# Altium PCB PCB2.PcbDoc (part 1 of 2)
Units mm, origin at the board's own origin, x right, y up, seen from the top; angles counter-clockwise.
Board outline 152.4 x 101.6 mm, 2 copper layers (Top Layer, Bottom Layer); 137 components, 157 nets, 564 pads, 402 vias.
Unrouted connection lines stored in the file: 6.
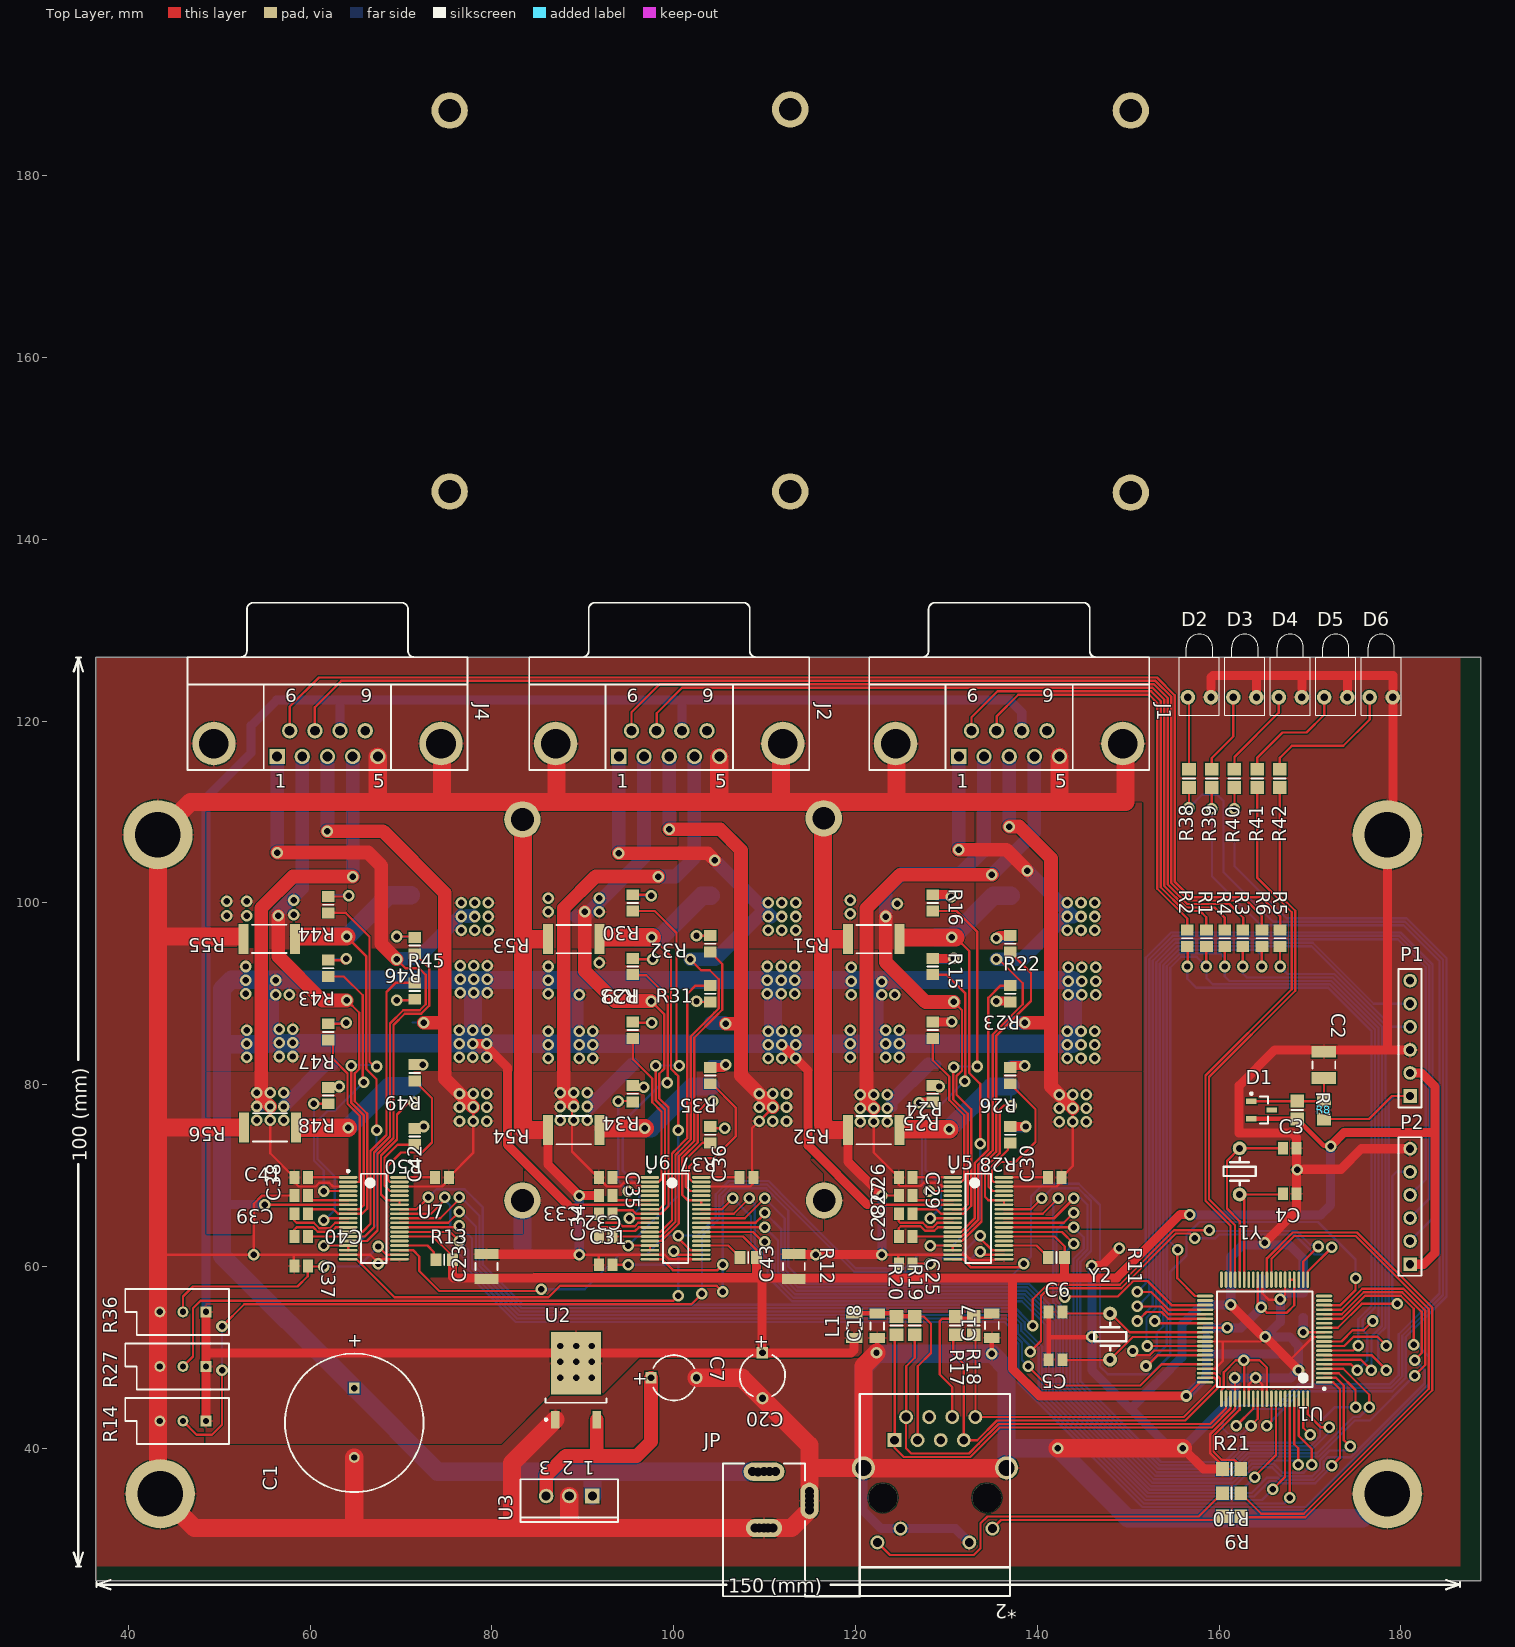
[diagram p0: Top Layer view]
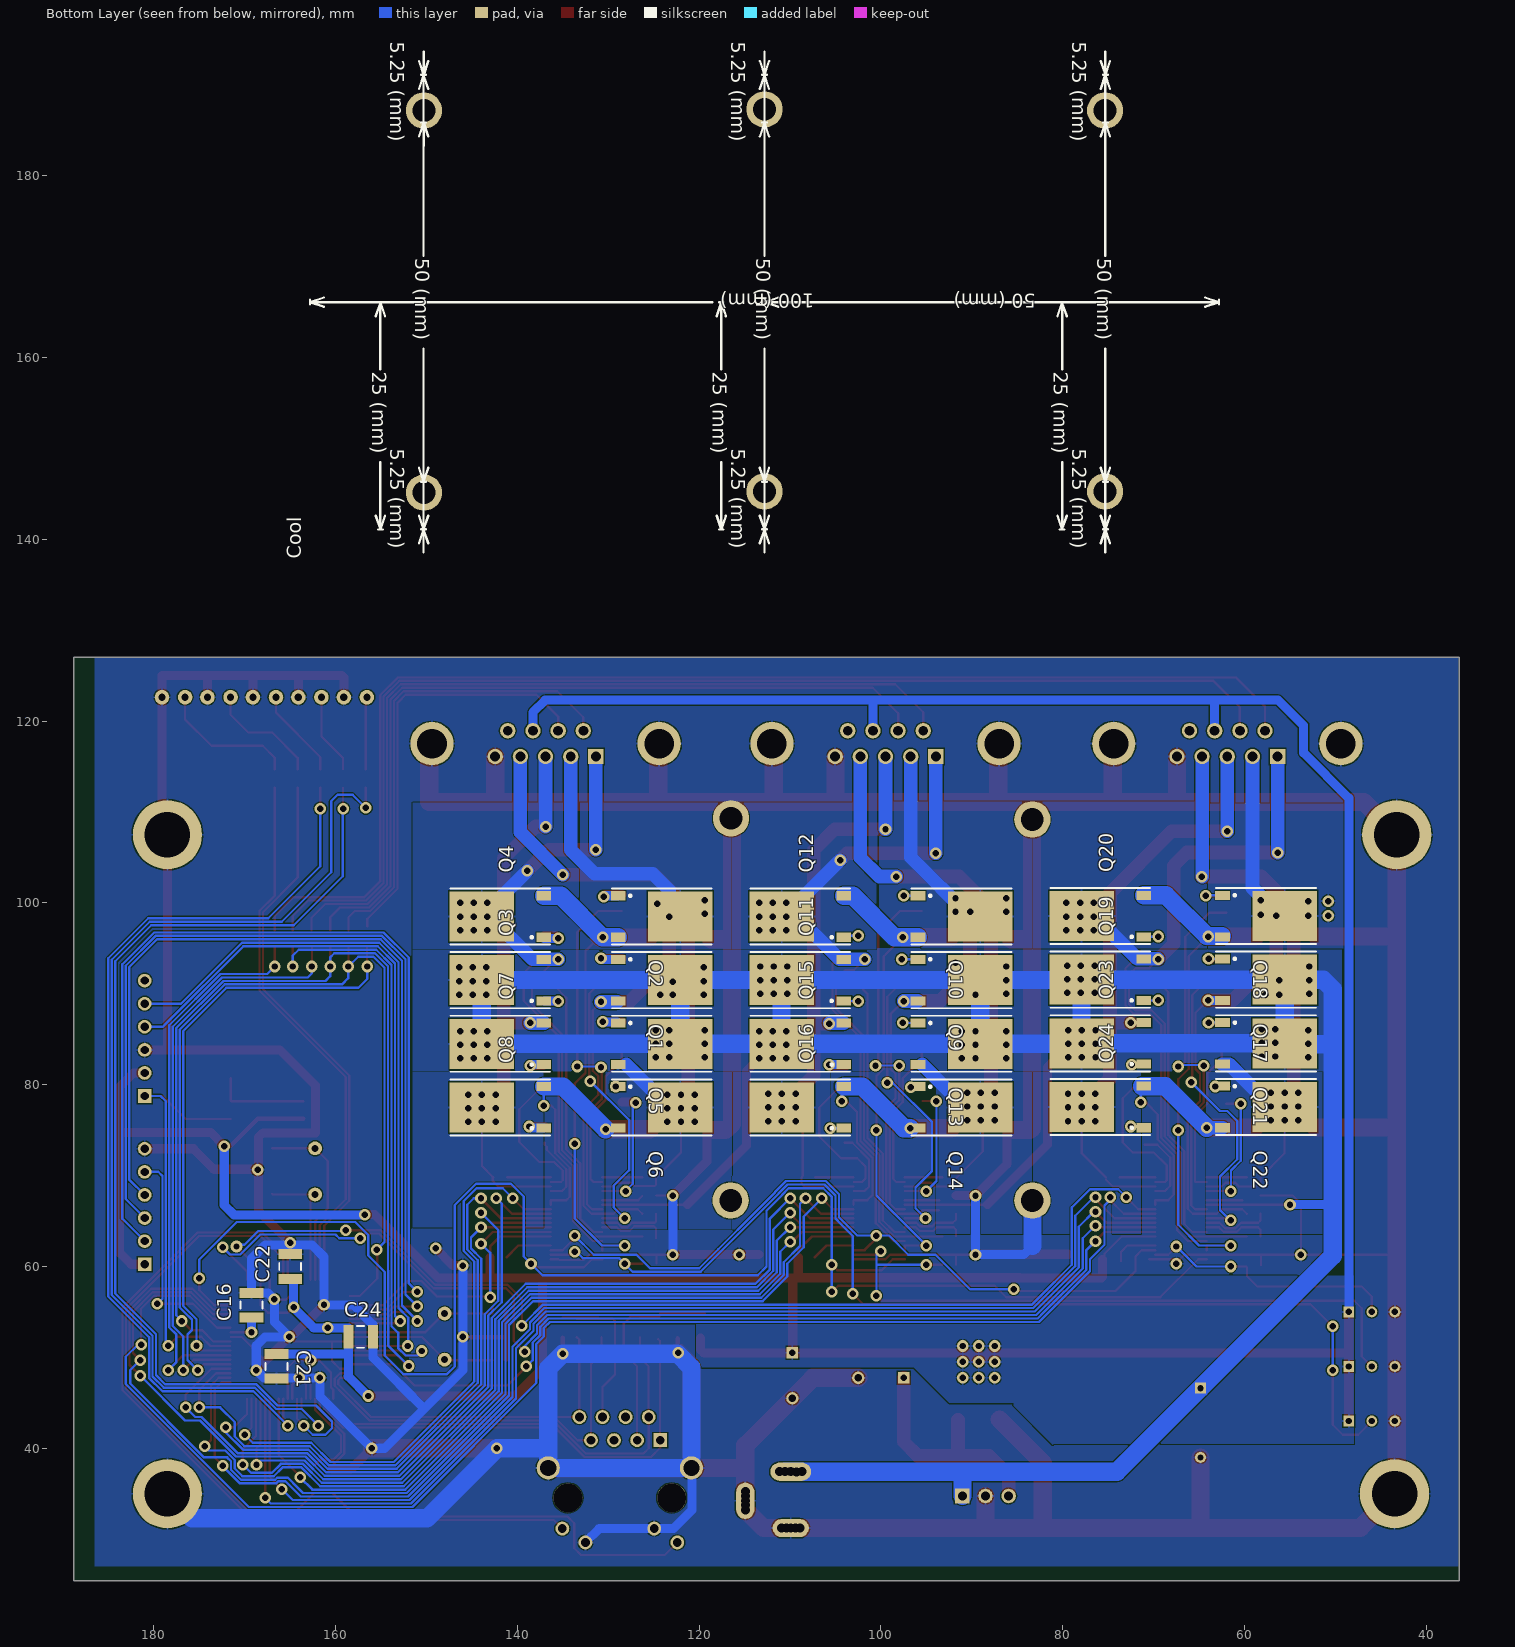
[diagram p1: Bottom Layer view, seen from below]

## Layer stack, top to bottom
Top Layer: signal copper 0.0356
Dielectric: dielectric 0.32, FR-4, Dk 4.8
Bottom Layer: signal copper 0.0356

## Board outline
36.4,25.4 188.8,25.4 188.8,127 36.4,127

## Design rules (kind name [scope] priority, off if disabled: settings)
Clearance [All] p1: gap=0.127
PolygonConnect [All] p1: connectstyle=Relief reliefconductorwidth=0.254 reliefentries=4 polygonreliefangle="90 Angle"
RoutingVias [All] p1: holewidth=0.711 width=1.27 viastyle="Through Hole" minholewidth=0.711 minwidth=1.27 maxholewidth=0.711 maxwidth=1.27
SilkscreenOverComponentPads [All] p1: minsilkscreentomaskgap=0.254
SolderMaskExpansion [All] p1: expansion=0.102
Width [All] p1: maxlimit=2.54 minlimit=0.254 preferedwidth=0.254
27 further rules are at their usual default settings.

## Components (designator, comment, footprint, x,y, rotation, side; value= is the part's Value field where it differs from the comment)
*2 "LU1T516-43" EthernetCON 128.729,34.544 r270 top
C1 "Cap Pol1" RB7.6-15 64.848,42.799 r90 top
C2 "Cap" CAPC3225N 171.528,82.169 r270 top
C3 "Cap" CAPC2012L 167.75,73 r0 top
C4 "Cap" CAPC2012L 167.75,68 r180 top
C5 "Cap" CAPC2012L 142,49.75 r180 top
C6 "Cap" CAPC2012L 142,55 r0 top
C7 "Cap Pol1" CAPPR5-5x5 100,47.75 r0 top
C16 "Cap" CAPC3225L 169.25,55.75 r90 bottom
C17 "Cap" CAPC3216L 135,53.5 r90 top
C18 "Cap" CAPC3216L 122.379,53.467 r90 top
C20 "Cap Pol1" CAPPR5-5x5 109.75,48 r270 top
C21 "Cap" CAPC3225L 166.5,49 r270 bottom
C22 "Cap" CAPC3225L 165,60 r90 bottom
C23 "Cap" CAPC3225L 79.4,60 r90 top
C24 "Cap" CAPC3225L 157.25,52.25 r180 bottom
C25 "Cap" CAPC2012L 125.5,60.3 r0 top
C26 "Cap" CAPC2012L 125.5,67.8 r180 top
C27 "Cap" CAPC2012L 125.5,65.8 r180 top
C28 "Cap" CAPC2012L 125.5,63.3 r180 top
C29 "Cap" CAPC2012L 125.5,69.8 r0 top
C30 "Cap" CAPC2012L 141.9,69.8 r180 top
C31 "Cap" CAPC2012L 92.5,60.2 r0 top
C32 "Cap" CAPC2012L 92.5,67.8 r180 top
C33 "Cap" CAPC2012L 92.5,65.8 r180 top
C34 "Cap" CAPC2012L 92.5,63.3 r180 top
C35 "Cap" CAPC2012L 92.5,69.8 r0 top
C36 "Cap" CAPC2012L 108,69.8 r180 top
C37 "Cap" CAPC2012L 59,60.05 r0 top
C38 "Cap" CAPC2012L 59,67.8 r180 top
C39 "Cap" CAPC2012L 59,65.8 r180 top
C40 "Cap" CAPC2012L 59,63.3 r180 top
C41 "Cap" CAPC2012L 59,69.8 r0 top
C42 "Cap" CAPC2012L 74.5,69.8 r180 top
C43 "Cap" CAPC3225L 113.2,60 r90 top
Cool "Cooler" "PCBComponent_1 - duplicate" 62.9,141.2 r0 bottom
D1 "Diode" SOT95P240-3N 164.67,77.216 r0 top
D2 "Power" LED-1 157.825,122.625 r90 top
D3 "Run" LED-1 162.825,122.625 r90 top
D4 "Alfa" LED-1 167.825,122.625 r90 top
D5 "Delta" LED-1 172.825,122.625 r90 top
D6 "Focus" LED-1 177.825,122.625 r90 top
J1 "D Connector 9" D-SUB-9 136.9,116.1 r0 top
J2 "D Connector 9" D-SUB-9 99.5,116.1 r0 top
J4 "D Connector 9" D-SUB-9 61.9,116.1 r0 top
JP "PWR2.5" KLD-0202 109.925,23.725 r90 top
L1 "Inductor" INDC3216AL 119.839,53.467 r90 top
P1 "Программатор" HDR1X6 181,78.75 r90 top
P2 "SPI" HDR1X6 181,60.25 r90 top
Q1 "IRFR2405" TO-252AA 125.5,91.5 r270 bottom
Q2 "IRFR2405" TO-252AA 125.5,98.5 r270 bottom
Q3 "IRFR2405" TO-252AA 140.5,91.5 r90 bottom
Q4 "IRFR2405" TO-252AA 140.5,98.5 r90 bottom
Q5 "IRFR2405" TO-252AA 125.5,84.5 r270 bottom
Q6 "IRFR2405" TO-252AA 125.5,77.5 r270 bottom
Q7 "IRFR2405" TO-252AA 140.5,84.5 r90 bottom
Q8 "IRFR2405" TO-252AA 140.5,77.5 r90 bottom
Q9 "IRFR2405" TO-252AA 92.5,91.5 r270 bottom
Q10 "IRFR2405" TO-252AA 92.5,98.5 r270 bottom
Q11 "IRFR2405" TO-252AA 107.5,91.5 r90 bottom
Q12 "IRFR2405" TO-252AA 107.5,98.5 r90 bottom
Q13 "IRFR2405" TO-252AA 92.5,84.5 r270 bottom
Q14 "IRFR2405" TO-252AA 92.5,77.5 r270 bottom
Q15 "IRFR2405" TO-252AA 107.5,84.5 r90 bottom
Q16 "IRFR2405" TO-252AA 107.5,77.5 r90 bottom
Q17 "IRFR2405" TO-252AA 59,91.55 r270 bottom
Q18 "IRFR2405" TO-252AA 59,98.55 r270 bottom
Q19 "IRFR2405" TO-252AA 74.5,91.55 r90 bottom
Q20 "IRFR2405" TO-252AA 74.5,98.55 r90 bottom
Q21 "IRFR2405" TO-252AA 59,84.55 r270 bottom
Q22 "IRFR2405" TO-252AA 59,77.55 r270 bottom
Q23 "IRFR2405" TO-252AA 74.5,84.55 r90 bottom
Q24 "IRFR2405" TO-252AA 74.5,77.55 r90 bottom
R1 "Res2" RESC2012N 158.6,96.1 r270 top
R2 "Res2" RESC2012N 156.5,96.1 r270 top
R3 "Res2" RESC2012N 162.6,96.1 r270 top
R4 "Res2" RESC2012N 160.6,96.1 r270 top
R5 "Res2" RESC2012N 166.7,96.1 r270 top
R6 "Res2" RESC2012N 164.7,96.1 r270 top
R7 "Res2" RESC2012M 168.607,77.216 r270 top
R8 "Res2" RESC2012M 171.528,77.216 r90 top
R9 "Res2" RESC2012M 161.368,32.512 r180 top
R10 "Res2" RESC2012M 161.368,35.052 r180 top
R11 "Res2" RESC2012N 142.1,61 r0 top
R12 "Res2" RESC2012N 108.2,61 r0 top
R13 "Res2" RESC2012N 74.75,60.75 r0 top
R14 "RPot" VR5 46,43 r180 top
R15 "Res2" RESC2012N 128.5,93 r270 top
R16 "Res2" RESC2012N 128.5,100 r270 top
R17 "Res2" RESC2012M 131,53.5 r270 top
R18 "Res2" RESC2012M 133,53.5 r270 top
R19 "Res2" RESC2012M 126.5,53.5 r270 top
R20 "Res2" RESC2012M 124.5,53.5 r270 top
R21 "Res2" RESC2012M 161.368,37.719 r0 top
R22 "Res2" RESC2012N 137,90 r90 top
R23 "Res2" RESC2012N 137,95.5 r270 top
R24 "Res2" RESC2012N 128.5,86 r270 top
R25 "Res2" RESC2012N 128.5,79 r270 top
R26 "Res2" RESC2012N 137,81 r270 top
R27 "RPot" VR5 46,49 r180 top
R28 "Res2" RESC2012N 137,74.5 r270 top
R29 "Res2" RESC2012N 95.5,93 r270 top
R30 "Res2" RESC2012N 95.5,100 r270 top
R31 "Res2" RESC2012N 104,90 r90 top
R32 "Res2" RESC2012N 104,95.5 r270 top
R33 "Res2" RESC2012N 95.5,86 r270 top
R34 "Res2" RESC2012N 95.5,79 r270 top
R35 "Res2" RESC2012N 104,81 r270 top
R36 "RPot" VR5 46,55 r180 top
R37 "Res2" RESC2012N 104,74.5 r270 top
R38 "Res2" RESC2012M 156.675,113.7 r90 top
R39 "Res2" RESC2012M 159.175,113.7 r90 top
R40 "Res2" RESC2012M 161.675,113.7 r90 top
R41 "Res2" RESC2012M 164.175,113.7 r90 top
R42 "Res2" RESC2012M 166.675,113.7 r90 top
R43 "Res2" RESC2012N 62,92.8 r270 top
R44 "Res2" RESC2012N 62,99.8 r270 top
R45 "Res2" RESC2012N 71.5,90.3 r90 top
R46 "Res2" RESC2012N 71.5,95.3 r270 top
R47 "Res2" RESC2012N 62,85.8 r270 top
R48 "Res2" RESC2012N 62,78.8 r270 top
R49 "Res2" RESC2012N 71.5,81.3 r270 top
R50 "Res2" RESC2012N 71.5,74.3 r270 top
R51 "Res2" RESC6332L 122,96 r180 top
R52 "Res2" RESC6332L 122,75 r180 top
R53 "Res2" RESC6332L 89,96 r180 top
R54 "Res2" RESC6332L 89,75 r180 top
R55 "Res2" RESC6332L 55.5,96.05 r180 top
R56 "Res2" RESC6332L 55.575,75.3 r180 top
U1 "PIC18F87J60-I/PT" TQFP-PT80_N 165,52 r180 top
U2 "LM1117DT-3.3" TD03B_N 89.25,47.5 r90 top
U3 "µA78M05CKC" KC03 88.5,34.75 r180 top
U5 "A3986" TSSOP50P640-38AM 133.5,65.3 r0 top
U6 "A3986" TSSOP50P640-38AM 100.2,65.3 r0 top
U7 "A3986" TSSOP50P640-38AM 67,65.3 r0 top
Y1 "XTAL" Quartz 162.25,73 r270 top
Y2 "XTAL" Quartz 148,49.75 r90 top

## Footprints (in the part's own frame and the unit in brackets; to place one, negate y for a bottom-side part, rotate by r counter-clockwise, add the part's x,y. Pads: shape width x height; smd on the part's side, far side on the other; paste and mask are expansions set on the pad)
CAPC2012L [mm] "Chip Capacitor, Body 2.0x1.3mm, IPC High Density"
  rect 1.1x1.4 smd: 1(-0.75,0) 2(0.75,0)
  body extent -1.1,-0.72 1.1,0.72, height 1.4
CAPC3216L [mm] "Chip Capacitor, Body 3.2x1.6mm, IPC High Density"
  rect 1.1x1.7 smd: 1(-1.35,0) 2(1.35,0)
  silkscreen extent -0.4,-0.75 0.4,0.75, body extent -1.7,-0.9 1.7,0.9, height 1.3
CAPC3225L [mm] "Chip Capacitor, Body 3.2x2.5mm, IPC High Density"
  rect 1.1x2.6 smd: 1(-1.35,0) 2(1.35,0)
  silkscreen extent -0.4,-1.2 0.4,1.2, body extent -1.7,-1.35 1.7,1.35, height 1.5
CAPC3225N [mm] "Chip Capacitor, Body 3.2x2.5mm, IPC Medium Density"
  rect 1.3x2.7 smd: 1(-1.45,0) 2(1.45,0)
  silkscreen extent -0.4,-1.25 0.4,1.25, body extent -1.7,-1.35 1.7,1.35, height 1.5
CAPPR5-5x5 [mm] "Capacitor, Electrolytic, Radial; Body 5 x 5 mm (Dia.xH typ); Pin Spacing 5 mm (typ)"
  rect 1.25x1.25 hole 0.75: 1(-2.5,0)
  round 1.35 hole 0.8: 2(2.5,0)
  silkscreen extent -2.26,-2.5 2.27,2.5
D-SUB-9 [mm] "Connector"
  rect 1.69x1.69 hole 1.09: 1(-5.54,0)
  round 1.69 hole 1.09: 2(-2.77,0) 3(0,0) 4(2.77,0) 5(5.54,0) 6(-4.155,2.84) 7(-1.385,2.84) 8(1.385,2.84) 9(4.155,2.84)
  round 4.76 hole 3.26: 10(-12.495,1.42) 11(12.495,1.42)
  silkscreen extent -15.4,-1.48 15.4,16.92, body extent -15.49,-1.52 15.49,17.02, height 6.35
EthernetCON [mil] "Ethernet connector w/two LEDs"
  rect 60x60 hole 38: 1(-250,-175)
  round 60 hole 38: 2(-350,-125) 3(-250,-75) 4(-350,-25) 5(-250,25) 6(-350,75) 7(-250,125) 8(-350,175) 9(193,-249) 10(133,-149) 11(193,149) 12(133,249)
  round 100 hole 70: 13(-130,-310) 14(-130,310)
  round 125 hole 125 unplated: 15(0,-225) 16(0,225)
  silkscreen extent -450,-325 425,325, body extent -450,-325 425,325, height 550
HDR1X6 [mm] "Connector; Header; 6 Position"
  rect 1.5x1.5 hole 0.9: 1(0,0)
  round 1.5 hole 0.9: 2(2.54,0) 3(5.08,0) 4(7.62,0) 5(10.16,0) 6(12.7,0)
  silkscreen extent -1.27,-1.27 13.97,1.27
INDC3216AL [mm] "Chip Inductor, Body 3.2x1.6mm, IPC High Density"
  rect 1.1x1.8 smd: 1(-1.35,0) 2(1.35,0)
  silkscreen extent -0.4,-0.8 0.4,0.8, body extent -1.7,-0.9 1.7,0.9, height 0.55
KC03 [mm] "TO, Thru-Hole, Vertical, Heatsink Mounted; 3 In-Line Leads; Pitch 2.54 mm"
  rect 1.6x1.6 hole 1: 1(-2.54,0)
  round 1.6 hole 1: 2(0,0) 3(2.54,0)
  silkscreen extent -5.35,-1.85 5.35,2.85
KLD-0202 [mm] "DC Power Jack, 2.5mm, KLD Series, PCB Mount"
  oval 2x4.5 hole 1: 1(13.7,0)
  round 1.5 hole 1: 1A(13.7,-1.25) 1B(13.7,1.25) 2A(7.5,-1) 2B(7.5,1) 3A(9.5,-5) 3B(11.5,-5)
  oval 2x4 hole 1: 2(7.5,0)
  oval 4x2 hole 1: 3(10.5,-5)
  silkscreen extent 0,-4.5 14.6,4.5
LED-1 [mm] "Typical RED GaAs LED; 2 Leads"
  round 1.6 hole 0.8: 1(0,1.27) 2(0,-1.27)
  silkscreen extent -2,-2.2 6.95,2.2
"PCBComponent_1 - duplicate" [mm]
  round 4 hole 2.5: 1(12.446,-45.974) 2(49.911,-46.101) 3(87.376,-45.974) 4(87.376,-3.937) 5(49.911,-4.064) 6(12.446,-4.064)
  silkscreen extent -0.09,-52.43 99.91,2.65, body extent 0,-50.04 100.08,0, height 18
Quartz [mil]
  round 60 hole 30: 1(0,0) 2(200,0)
  silkscreen extent 40,-70 160,70, body extent -100,-100 300,100, height 90
RB7.6-15 [mm] "Polarized Capacitor (Radial); 2 Leads"
  rect 1.2x1.2 hole 0.7: 1(3.81,0)
  round 1.2 hole 0.7: 2(-3.81,0)
  silkscreen extent -7.62,-7.62 7.62,7.62
RESC2012M [mm] "Chip Resistor, Body 2.0x1.2mm, IPC Low Density"
  rect 1.4x1.5 smd: 1(-1,0) 2(1,0)
  silkscreen extent 0,-0.65 0,0.65, body extent -1.07,-0.7 1.07,0.7, height 0.7
RESC2012N [mm] "Chip Resistor, Body 2.0x1.2mm, IPC Medium Density"
  rect 1.2x1.4 smd: 1(-0.9,0) 2(0.9,0)
  silkscreen extent 0,-0.6 0,0.6, body extent -1.07,-0.7 1.07,0.7, height 0.7
RESC6332L [mm] "Chip Resistor, Body 6.3x3.2mm, IPC High Density"
  rect 1.1x3.3 smd: 1(-2.85,0) 2(2.85,0)
  silkscreen extent -1.9,-1.55 1.9,1.55, body extent -3.22,-1.68 3.22,1.68, height 0.9
SOT95P240-3N [mm] "SOT23, 3-Leads, Body 2.9x1.3mm, Pitch 0.95mm, Lead Span 2.4mm, IPC Medium Density"
  rect 1.15x0.6 smd: 1(-1.125,0.95) 2(-1.125,-0.95) 3(1.125,0)
  silkscreen extent -1.25,-1.5 0.7,1.92, body extent -0.7,-1.5 0.7,1.5, height 1.14
TD03B_N [mm] "D-PAK, 4-Leads, Body 6.1x6.6mm, Pitch 2.29mm, Lead Span 9.7mm, IPC Medium Density"
  rect 1.9x0.95 smd: 1(-4.35,2.28) 3(-4.35,-2.28)
  rect 6.9x5.5 smd: 4(1.85,0)
  silkscreen extent -4.47,-3.35 -2,3.43, body extent -2.5,-3.35 3.7,3.35, height 2.38
TO-252AA [mm] "D-PAK/TO-252-AA; 3 Leads (1 Cropped); Body 10.4 (inc. leads) x 6.7 mm (LxW max)"
  rect 1x1.6 smd: 1(-2.285,-3.425) 3(2.285,-3.425)
  rect 5.5x7.1 smd: 4(0,3.425)
  silkscreen extent -3.09,-4.13 3.09,6.88
TQFP-PT80_N [mm] "Thin QFP, 80-Leads, Body 12x12mm, Pitch 0.5mm, IPC Medium Density"
  oval 1.8x0.3 smd: 1(-6.55,4.75) 2(-6.55,4.25) 3(-6.55,3.75) 4(-6.55,3.25) 5(-6.55,2.75) 6(-6.55,2.25) 7(-6.55,1.75) 8(-6.55,1.25) 9(-6.55,0.75) 10(-6.55,0.25) 11(-6.55,-0.25) 12(-6.55,-0.75) 13(-6.55,-1.25) 14(-6.55,-1.75) 15(-6.55,-2.25) 16(-6.55,-2.75) 17(-6.55,-3.25) 18(-6.55,-3.75) 19(-6.55,-4.25) 20(-6.55,-4.75) 41(6.55,-4.75) 42(6.55,-4.25) 43(6.55,-3.75) 44(6.55,-3.25) 45(6.55,-2.75) 46(6.55,-2.25) 47(6.55,-1.75) 48(6.55,-1.25) 49(6.55,-0.75) 50(6.55,-0.25) 51(6.55,0.25) 52(6.55,0.75) 53(6.55,1.25) 54(6.55,1.75) 55(6.55,2.25) 56(6.55,2.75) 57(6.55,3.25) 58(6.55,3.75) 59(6.55,4.25) 60(6.55,4.75)
  oval 0.3x1.8 smd: 21(-4.75,-6.55) 22(-4.25,-6.55) 23(-3.75,-6.55) 24(-3.25,-6.55) 25(-2.75,-6.55) 26(-2.25,-6.55) 27(-1.75,-6.55) 28(-1.25,-6.55) 29(-0.75,-6.55) 30(-0.25,-6.55) 31(0.25,-6.55) 32(0.75,-6.55) 33(1.25,-6.55) 34(1.75,-6.55) 35(2.25,-6.55) 36(2.75,-6.55) 37(3.25,-6.55) 38(3.75,-6.55) 39(4.25,-6.55) 40(4.75,-6.55) 61(4.75,6.55) 62(4.25,6.55) 63(3.75,6.55) 64(3.25,6.55) 65(2.75,6.55) 66(2.25,6.55) 67(1.75,6.55) 68(1.25,6.55) 69(0.75,6.55) 70(0.25,6.55) 71(-0.25,6.55) 72(-0.75,6.55) 73(-1.25,6.55) 74(-1.75,6.55) 75(-2.25,6.55) 76(-2.75,6.55) 77(-3.25,6.55) 78(-3.75,6.55) 79(-4.25,6.55) 80(-4.75,6.55)
  silkscreen extent -6.68,-5.25 5.25,5.57, body extent -6,-6 6,6, height 1.2
TSSOP50P640-38AM [mm] "TSSOP, 38-Leads, Body 9.7x4.4mm, Pitch 0.5mm, IPC Low Density"
  oval 2.05x0.3 smd: 1(-2.825,4.5) 2(-2.825,4) 3(-2.825,3.5) 4(-2.825,3) 5(-2.825,2.5) 6(-2.825,2) 7(-2.825,1.5) 8(-2.825,1) 9(-2.825,0.5) 10(-2.825,0) 11(-2.825,-0.5) 12(-2.825,-1) 13(-2.825,-1.5) 14(-2.825,-2) 15(-2.825,-2.5) 16(-2.825,-3) 17(-2.825,-3.5) 18(-2.825,-4) 19(-2.825,-4.5) 20(2.825,-4.5) 21(2.825,-4) 22(2.825,-3.5) 23(2.825,-3) 24(2.825,-2.5) 25(2.825,-2) 26(2.825,-1.5) 27(2.825,-1) 28(2.825,-0.5) 29(2.825,0) 30(2.825,0.5) 31(2.825,1) 32(2.825,1.5) 33(2.825,2) 34(2.825,2.5) 35(2.825,3) 36(2.825,3.5) 37(2.825,4) 38(2.825,4.5)
  silkscreen extent -2.95,-4.9 1.4,5.32, body extent -2.25,-4.9 2.25,4.9, height 1.2
VR5 [mm] "Variable Resistor, Thru-Hole; 3 Leads"
  rect 1.2x1.2 hole 0.7: 1(-2.54,0)
  round 1.2 hole 0.7: 2(0,0) 3(2.54,0)
  silkscreen extent -5.08,-2.54 6.35,2.54

## Part data
C1 C7 C20: "Polarized Capacitor (Radial)"
C2 C3 C4 C5 C6 C16 C17 C18 C21 C22 C23 C24 C25 C26 C27 C28 C29 C30 C31 C32 C33 C34 C35 C36 C37 C38 C39 C40 C41 C42 C43: "Capacitor"
D1: "Default Diode"
D2 D3 D4 D5 D6: library part LED1, "Typical RED GaAs LED"
J1 J2 J4: "Receptacle Assembly, 9 Position, Right Angle"
JP: "Low Voltage Power Supply Connector"
P1 P2: library part "Header 6", "Header, 6-Pin"
Q1 Q2 Q3 Q4 Q5 Q6 Q7 Q8 Q9 Q10 Q11 Q12 Q13 Q14 Q15 Q16 Q17 Q18 Q19 Q20 Q21 Q22 Q23 Q24: "HEXFET Power MOSFET"
R1 R2 R3 R4 R5 R6 R7 R8 R9 R10 R11 R12 R13 R15 R16 R17 R18 R19 R20 R21 R22 R23 R24 R25 R26 R28 R29 R30 R31 R32 R33 R34 R35 R37 R38 R39 R40 R41 R42 R43 R44 R45 R46 R47 R48 R49 R50 R51 R52 R53 R54 R55 R56: "Resistor"
R14 R27 R36: "Potentiometer"
U1: "High Performance, 1-Mbit Flash Microcontroller with Ethernet, 128K Flash, 80-Pin TQFP, Industrial Temperature Range"
U2: "800mA Low-Dropout Linear Regulator"
U3: "Positive-Voltage Regulator"
U5 U6 U7: "Stepper Controller w External Full brige"
Y1 Y2: "Crystal Oscillator"

## Free pads (board coordinates)
  round 4 hole 2.5: 0(83.346,67.264) 1(83.346,109.174) 3(116.5,109.301) 5(116.537,67.264)
  round 1.524 hole 1: 0(109.4,31.225) 0(110.375,31.225) 0(114.925,33.75) 0(114.925,34.75) 1(109.275,37.4) 1(110.55,37.425)
  round 7.62 hole 5: 1(43.25,107.5) 1(43.5,35) 1(178.5,35) 1(178.5,107.5)

## Via types
v1: diameter 1.27, hole 0.711, Top Layer to Bottom Layer, 402 vias

## Nets (pads, with @x,y where several pads share a name; then routed paths per layer and width w, separated by ;. In a path a pad name is that pad's centre, name@x,y a point inside that pad or via, vN(x,y) a via of type N, cw(c..) or ccw(c..) an arc to the next point about the centre after c; other vN are vias at no path point)
+5: C7.1 U2.3 U3.3 | length 26.4
  Top Layer w1.5: U3.3@85.96,34.75 85.96,37.01 88.1,39.15 95.925,39.15 97.5,40.725 C7.1@97.5,47.75 ; 91.53,39.15 U2.3@91.53,43.15
+30: C1.1 JP.1 JP.1A JP.1B pad.1@109.275,37.4 pad.1@110.55,37.425 Q1.4 Q3.4 Q5.4 Q7.4 Q9.4 Q11.4 Q13.4 Q15.4 Q17.4 Q19.4 Q21.4 Q23.4 U3.1 U5.7 U6.7 U7.7 | length 408.2
  Top Layer w0.254: v1@54.686,67.114 v1(55,66.8) U7.7@64.175,66.8 ; 88.3,66.8 U6.7@97.375,66.8 ; 121.3,66.8 U5.7@130.675,66.8
  Top Layer w1: v1(77.9,84.5) 79.1,84.5 81.7,81.9 81.7,73.4 88.3,66.8 ; v1(111.9,84.4) 114.773,81.527 114.773,73.327 121.3,66.8
  Bottom Layer w1: 50.3,66.8 v1(55,66.8)
  Bottom Layer w2: Q21.4@55.046,84.454 50.3,84.454 ; v1(77.9,84.5) Q15.4@110.925,84.5 ; Q19.4@77.9,91.5 Q11.4@110.925,91.5 ; Q13.4@89.075,84.5 Q9.4@89.075,91.5 ; U3.1@91.04,34.75 91.04,37.335 ; pad.1@110.55,37.425 JP.1@109.925,37.425 JP.1B@108.675,37.425 74.032,37.425 C1.1@64.848,46.609 50.3,61.157 50.3,66.8 50.3,73.8 50.3,84.454 ; Q5.4@122.075,84.5 Q1.4@122.075,91.5 ; 50.3,84.454 50.3,90.5 51.35,91.55 Q17.4@55.575,91.55 ; Q17.4@55.575,91.55 Q21.4@55.575,84.55 Q23.4@77.925,84.55 Q19.4@77.925,91.55 Q17.4@55.575,91.55 ; Q15.4@110.925,84.5 Q11.4@110.925,91.5 ; Q15.4@110.925,84.5 Q7.4@143.925,84.5 Q3.4@143.925,91.5 Q11.4@110.925,91.5
  other v1: 86.2,82.9 89.6,82.9 91.1,82.9 110.4,82.9 111.9,82.9 113.4,82.9 143.3,82.9 144.8,82.9 146.3,82.9 53,83 76.4,83 77.9,83 79.4,83 119.4,83 123.3,83 124.8,83 56.6,83.1 58.1,83.1 86.2,84.4 89.6,84.4 91.1,84.4 110.4,84.4 113.4,84.4 143.3,84.4 144.8,84.4 146.3,84.4 53,84.5 76.4,84.5 77.9,84.5 79.4,84.5 119.4,84.5 123.3,84.5 124.8,84.5 56.6,84.6 58.1,84.6 86.2,85.9 89.6,85.9 91.1,85.9 110.4,85.9 111.9,85.9 113.4,85.9 143.3,85.9 144.8,85.9 146.3,85.9 53,86 76.4,86 77.9,86 79.4,86 119.4,86 123.3,86 124.8,86 56.6,86.1 58.1,86.1 56.2,89.9 57.7,89.9 89.6,89.9 119.5,89.9 122.9,89.9 124.3,89.9 143.4,89.9 144.9,89.9 146.4,89.9 52.9,90 86.2,90 110.3,90 111.8,90 113.3,90 76.5,90.1 78,90.1 79.5,90.1 122.9,91.3 119.5,91.4 143.4,91.4 144.9,91.4 146.4,91.4 52.9,91.5 56.2,91.5 86.2,91.5 110.3,91.5 111.8,91.5 113.3,91.5 76.5,91.6 78,91.6 79.5,91.6 119.5,92.9 143.4,92.9 144.9,92.9 146.4,92.9 52.9,93 86.2,93 110.3,93 111.8,93 113.3,93 76.5,93.1 78,93.1 79.5,93.1 91.8,93.4
DIRALFA: U1.17 U5.30 | length 95.9
  Top Layer w0.254: U5.30@136.325,65.8 140.6,65.8 v1(142.3,67.5) ; U1.17@171.55,55.25 173.434,55.25 175.735,57.551 180.284,57.551 182.67,55.165 182.67,49.17 v1(181.5,48)
  Bottom Layer w0.254: v1(142.3,67.5) 141.73,66.93 141.73,56.074 143.206,54.598 143.206,46.739 152.969,36.976 161.202,36.976 163.315,39.089 170.943,39.089 174.916,43.062 176.562,43.062 v1(181.5,48)
DIRDELTA: U1.16 U6.30 | length 128.8
  Top Layer w0.254: U6.30@103.025,65.8 106.6,65.8 v1(108.3,67.5) ; U1.16@171.55,54.75 173.472,54.75 175.892,57.17 180.126,57.17 182.289,55.007 182.289,50.489 v1(181.5,49.7)
  Bottom Layer w0.254: v1(108.3,67.5) 108.9,66.9 108.9,62.251 110.683,60.468 110.683,59.062 113.178,56.567 138.439,56.567 141.301,53.705 141.301,45.95 152.18,35.071 163.571,35.071 164.129,35.629 165.27,36.77 166.426,36.77 166.647,36.549 170.41,36.549 171.511,37.65 171.511,38.579 171.932,39 174.461,39 182.6,47.139 182.6,48.6 v1(181.5,49.7)
DIRFOCUS: U1.15 U7.30 | length 161.1
  Top Layer w0.254: U7.30@69.825,65.8 73.3,65.8 74.8,67.3 v1(74.8,67.6) ; U1.15@171.55,54.25 173.511,54.25 176.05,56.789 179.968,56.789 181.4,55.357 v1(181.4,51.4)
  Bottom Layer w0.254: v1(74.8,67.6) 74.8,67.3 75.4,66.7 75.4,62.4 77,60.8 77,59.506 82.606,53.9 85.7,53.9 136.406,53.9 137.087,53.219 137.087,52.297 137.919,51.465 137.919,47.176 151.548,33.547 169.547,33.547 183.075,47.075 183.075,50.075 181.75,51.4 v1(181.4,51.4)
GND: *2.10 *2.11 *2.13 *2.14 C1.2 C2.1 C3.2 C4.1 C5.2 C6.1 C7.2 C16.2 C17.1 C18.1 C20.2 C21.2 C22.2 C23.2 C24.2 C25.1 C26.2 C31.1 C32.2 C37.1 C38.2 C43.2 Cool.1 Cool.2 Cool.3 Cool.4 Cool.5 Cool.6 D2.2 D3.2 D4.2 D5.2 D6.2 J1.5 J1.10 J1.11 J2.5 J2.10 J2.11 J4.5 J4.10 J4.11 JP.2 JP.2A JP.2B JP.3 JP.3A JP.3B P1.3 P2.6 pad.0 pad.1@43.5,35 pad.1@43.25,107.5 pad.1@83.346,109.174 pad.1@178.5,35 pad.1@178.5,107.5 pad.3 pad.5 R14.3 R21.1 R27.3 R36.3 R51.2 R52.2 R53.2 R54.2 R55.2 R56.2 U1.11 U1.26 U1.31 U1.51 U1.57 U1.64 U1.67 U1.70 U2.1 U3.2 U5.18 U5.20 U6.18 U6.20 U7.18 U7.20 | length 1078.2
  Top Layer w0.254: 43.35,61.3 58.2,61.3 ; v1(53.8,61.3) 53.8,66.9 54.7,67.8 C38.2@58.25,67.8 ; C37.1@58.2,60.1 58.2,61.3 ; U7.20@70.5,60.8 U7.20@69.825,60.8 67.1,60.8 66.6,61.3 U7.18@64.175,61.3 58.2,61.3 ; v1(89.6,61.3) U6.18@97.375,61.3 99,61.3 99.5,60.8 U6.20@103.025,60.8 ; C31.1@91.75,60.2 91.75,61.25 ; JP.2B@108.925,31.225 pad.0@109.4,31.225 ; v1@122.646,68.054 v1@122.9,68.054 ; v1(122.9,61.3) 124.7,61.3 ; v1(122.9,67.8) C26.2@124.75,67.8 ; C25.1@124.7,60.35 124.7,61.3 ; U5.20@136.325,60.8 135.468,60.8 135.379,60.711 134.068,60.711 133.332,60.711 132.689,60.711 132.1,61.3 U5.18@130.675,61.3 124.7,61.3 ; U1.57@158.45,48.75 159.55,48.75 160.4,49.6 160.4,51.75 ; U1.51@158.45,51.75 160.4,51.75 ; R21.1@160.368,37.719 160.368,38.093 159.03,39.431 159.03,41.563 161.75,44.283 U1.64@161.75,45.012 ; U1.64@161.75,45.45 v1@161.75,47.725 ; U1.67@163.25,45.45 163.25,47.025 v1(164,47.775) 164.75,47.025 U1.70@164.75,45.45 ; U1.31@164.75,58.55 164.75,57.05 165.475,56.325 v1@166.675,56.325 ; v1(165.075,52.25) 164.575,51.75 160.4,51.75 ; v1(166.725,56.375) 167.25,56.9 U1.26@167.25,58.55 ; 167.7,49.625 170.324,52.25 U1.11@171.55,52.25
  Top Layer w0.5: v1@122.379,50.579 C18.1@122.379,52.117 ; v1(135,50.4) C17.1@135,52.15 ; C5.2@141.25,49.75 141.25,52.2 ; C6.1@141.25,55 141.25,52.2 ; v1@145.95,52.2 141.25,52.2
  Top Layer w1: C23.2@79.4,61.35 v1@89.25,61.35 ; R54.2@86.15,75 86.15,71.25 v1(89.6,67.8) C32.2@91.75,67.8 ; C43.2@113.45,61.3 v1(122.9,61.3) ; R52.2@119.15,75 119.15,71.55 v1@122.646,68.054 ; v1(146,60.1) 147.1,60.1 v1(149,62) ; v1(156,40) 158.281,37.719 R21.1@160.368,37.719 ; D2.2@159.095,122.625 159.095,124.795 159.3,125 179.1,125 179.1,122.63 179.1,108.1 pad.1@178.5,107.5 178.5,83.93 ; v1(161.275,55.775) 164.8,52.25 v1(165.075,52.25) v1(168.725,48.6) ; D3.2@164.095,122.625 164.095,124.795 ; v1(165,62.625) 168.5,66.125 v1@168.5,70.65 ; C4.1@168.5,68 C3.2@168.5,73 168.5,74.2 168,74.7 162.2,74.7 162.2,79.9 166.13,83.83 P1.3@181,83.83 ; v1@168.65,70.5 168.85,70.7 173.4,70.7 175.65,72.95 P2.6@181,72.95 ; D4.2@169.095,122.625 169.095,124.995 ; D5.2@174.095,122.625 174.095,124.995
  Top Layer w2: pad.1@43.25,35.25 43.25,96.75 ; 43.25,75.3 R56.2@52.2,75.3 ; pad.1@43.5,35 47.275,31.225 64.8,31.225 82.2,31.225 ; 52,96.3 43.25,96.3 pad.1@43.25,107.5 44.55,108.8 46.85,111.1 74.5,111.1 ; 64.848,31.273 C1.2@64.848,38.989 ; 67.44,111.1 J4.5@67.44,116.1 ; J4.11@74.5,117.415 74.5,111.1 ; pad.1@83.4,111.1 83.4,75.2 83.6,75 85.6,75 ; 83.5,96 R53.2@85.7,96 ; U2.1@86.97,43.15 82.2,38.38 82.2,31.225 ; J2.10@87.1,117.425 87.1,111.1 ; 88.5,31.25 U3.2@88.5,34.75 ; C7.2@102.5,47.75 107.5,47.75 114.925,40.325 JP.3A@114.925,33.225 112.925,31.225 JP.2A@110.925,31.225 ; J2.5@105,116.06 105,111.1 ; JP.2B@108.925,31.225 82.2,31.225 ; J2.11@111.8,117.325 111.8,111.1 ; 114.925,37.9 114.979,37.846 *2.13@120.855,37.846 120.855,49.055 v1(122.3,50.5) ; 116.4,96 R51.2@118.7,96 ; R52.2@118.7,75 117.1,75 116.4,75.7 ; *2.13@120.905,37.796 136.553,37.796 *2.14@136.603,37.846 ; J1.10@124.5,117.425 124.5,111.1 ; v1(142.25,40) v1(156,40) ; 142.44,111.24 J1.5@142.44,116.1 ; J1.11@149.395,117.52 149.7,117.215 149.7,111.1 124.5,111.1 ; 74.5,111.1 87.1,111.1 ; 87.1,111.1 105,111.1 ; 105,111.1 111.8,111.1 ; 111.8,111.1 pad.3@116.4,111.1 ; 116.4,75.7 pad.3@116.4,111.1 ; 116.4,75.7 pad.3@116.4,111.1 ; pad.3@116.4,111.1 124.5,111.1
  Bottom Layer w1: 83.346,62.254 84.3,61.3 v1(89.6,61.3) v1(89.6,67.8) ; *2.13@120.799,37.79 120.799,33.201 122.834,31.166 130.99,31.166 *2.11@132.514,29.642 ; v1(122.9,61.3) v1(122.9,67.8) ; v1(146,60.1) v1(146,52.25) 146,48.6 154.6,40 v1(156,40) 161.725,45.725 v1(161.725,47.75) 167.875,47.75 v1(168.725,48.6) 168.725,51.275 167.75,52.25 v1(165.075,52.25) 166.725,53.9 166.725,54.675 v1(166.725,56.375) 167.45,57.1 C16.2@169.25,57.1 169.25,60.85 167.729,62.371 165,62.371 162.6,62.371 161.275,61.046 v1(161.275,55.775) 158.075,55.775 155.9,53.6 C24.2@155.9,52.25 155.9,50 153.512,47.612 152.638,46.738 150.25,44.35
  Bottom Layer w2: 83.346,62.254 pad.0@83.346,67.264 ; 136.603,40 v1(142.25,40) 149.957,32.293 175.793,32.293 177.1,33.6 pad.1@178.5,35 ; *2.13@120.855,37.846 120.855,48.855 122.4,50.4 v1(135,50.4) 136.603,48.797 136.603,47.548 *2.14@136.603,37.846 *2.13@120.855,37.846
  other v1: 67.5,60.3 115.6,61.3 168.575,70.65
MS1_ALFA: U1.4 U5.28 | length 75.9
  Top Layer w0.254: U5.28@136.325,64.8 142.7,64.8 142.9,64.8 v1(144,65.9) ; U1.4@171.55,48.75 173.65,48.75 176.5,45.9 v1(176.5,44.5)
  Bottom Layer w0.254: v1(144,65.9) 142.111,64.011 142.111,56.232 143.587,54.756 143.587,46.897 153.127,37.357 161.045,37.357 163.158,39.47 170.785,39.47 174.758,43.443 175.443,43.443 v1(176.5,44.5)
MS1_DELTA: U1.78 U6.28 | length 96.8
  Top Layer w0.254: U6.28@103.025,64.8 109,64.8 109.7,65.5 110,65.5 v1(110,65.9) ; U1.78@168.75,45.45 168.75,41.35 170.2,39.9 v1(170.2,38.2)
  Bottom Layer w0.254: v1(110,65.9) 111.838,64.062 111.838,59.523 113.651,57.71 138.912,57.71 142.444,54.178 142.444,46.423 152.653,36.214 161.518,36.214 163.585,38.281 166.019,38.281 166.989,37.311 169.311,37.311 170,38 v1@170.2,38
MS1_FOCUS: U1.76 U7.28 | length 129.1
  Top Layer w0.254: U7.28@69.825,64.8 75.2,64.8 v1(76.4,66) ; v1(167.75,34.55) U1.76@167.75,45.45
  Bottom Layer w0.254: v1@76.5,66.1 78.238,64.362 78.238,59.884 82.365,55.757 83.079,55.043 84.981,55.043 90.181,55.043 136.879,55.043 138.23,53.692 138.23,52.931 140.158,51.003 140.158,45.476 151.706,33.928 167.128,33.928 v1(167.75,34.55)
MS2_ALFA: U1.3 U5.29 | length 75.1
  Top Layer w0.254: U1.3@171.55,48.25 173.15,48.25 175,46.4 v1@175,44
  Top Layer w0.3: U5.29@136.325,65.3 141.8,65.3 v1(144,67.5)
  Bottom Layer w0.254: v1(144,67.5) 144.8,67.5 145.519,66.781 145.519,61.858 144.349,60.688 144.349,47.212 153.442,38.119 160.729,38.119 162.842,40.232 170.032,40.232 171.1,41.3 171.1,42.9 172.7,44.5 v1(175,44.5)
MS2_DELTA: U1.77 U6.29 | length 95.7
  Top Layer w0.254: U6.29@103.025,65.3 107.8,65.3 v1(110,67.5) ; U1.77@168.25,45.45 168.25,40.45 168.7,40 v1(168.7,38.2)
  Bottom Layer w0.254: v1(110,67.5) 112.219,65.281 112.219,59.681 113.809,58.091 139.07,58.091 142.825,54.336 142.825,46.581 152.811,36.595 161.36,36.595 163.427,38.662 168.238,38.662 v1(168.7,38.2)
MS2_FOCUS: U1.75 U7.29 | length 129.8
  Top Layer w0.254: U7.29@69.825,65.3 74.3,65.3 76.5,67.5 v1(76.4,67.6) ; v1(165.9,35.5) 167.25,36.85 U1.75@167.25,45.45
  Bottom Layer w0.254: v1(76.4,67.6) 76.4,67.4 76.8,67.4 78.619,65.581 78.619,64.52 78.619,64.204 78.619,60.042 82.523,56.138 83.237,55.424 84.823,55.424 90.023,55.424 137.037,55.424 138.611,53.85 138.611,53.089 140.539,51.161 140.539,45.634 151.864,34.309 164.709,34.309 v1(165.9,35.5) 165.9,35.825 v1@165.5,35.825
Net*2_1: *2.1 R20.2 U1.63 | length 52.7
  Top Layer w0.254: *2.1@124.284,40.894 124.284,40.066 125.3,39.05 132.625,39.05 135.866,42.291 159.178,42.291 161.25,44.363 U1.63@161.25,45.45 ; *2.1@124.305,40.894 124.305,51.805 R20.2@124.5,52
Net*2_2: *2.2 R19.2 U1.62 | length 51.2
  Top Layer w0.254: *2.2@125.554,43.434 125.554,39.996 126.119,39.431 132.467,39.431 133.549,40.513 135.708,42.672 157.922,42.672 159.02,42.672 160.323,43.975 160.75,44.402 U1.62@160.75,45.45 ; *2.2@125.575,43.434 125.575,49.025 126.5,49.95 R19.2@126.5,52.25
Net*2_3: *2.3 C18.2 L1.2 R19.1 R20.1 | length 22.7
  Top Layer w0.254: R20.1@124.15,54.85 R20.1@124.5,54.5 ; R19.1@126.5,54.5 127.5,54.5 128.3,53.7 128.3,50.475 126.845,49.02 *2.3@126.845,40.894
  Top Layer w0.5: L1.2@119.5,54.85 122,54.85 R20.1@124.15,54.85 ; R20.1@124.5,54.5 R19.1@126.5,54.5
Net*2_6: *2.6 C17.2 R17.1 R18.1 | length 19.4
  Top Layer w0.254: *2.6@130.634,43.434 130.634,46.741 129.25,48.125 129.25,54 129.5,54.25 130.75,54.25 R18.1@133.5,54.25 ; R17.1@131.1,54.35 C17.2@135,54.35
Net*2_7: *2.7 R17.2 U1.58 | length 45.2
  Top Layer w0.254: R17.2@130.75,52.25 130.75,50.425 131.904,49.271 *2.7@131.904,40.894 133.391,40.894 135.55,43.053 156.267,43.053 159.358,46.144 160.096,46.882 160.096,47.675 159.521,48.25 U1.58@158.45,48.25
Net*2_8: *2.8 R18.2 U1.59 | length 38.8
  Top Layer w0.254: *2.8@133.174,43.434 135.384,43.434 156.109,43.434 159.715,47.04 159.715,47.517 159.482,47.75 U1.59@158.45,47.75 ; *2.8@133.195,43.445 133.195,51.945 R18.2@133.5,52.25
Net*2_9: *2.9 R10.2 | length 42.9
  Top Layer w0.254: *2.9@122.404,29.642 123.796,28.25 133,28.25 133.75,29 133.75,31.75 134.5,32.5 135.849,32.5 157.75,32.5 R10.2@160.335,35.085
Net*2_12: *2.12 R9.2 | length 25.4
  Top Layer w0.254: *2.12@135.388,31.5 136.007,32.119 159.975,32.119 R9.2@160.368,32.512
NetC2_2: C2.2 D1.1 R7.1 R8.2 | length 10.5
  Top Layer w0.254: D1.1@163.545,78.166 171.478,78.166 R8.2@171.528,78.216 C2.2@171.528,80.719
NetC3_1: C3.1 U1.36 Y1.1 | length 20.4
  Top Layer w0.254: U1.36@162.25,58.55 162.25,64.975 160.85,66.375 160.85,71.6 Y1.1@162.25,73 C3.1@167,73
NetC4_2: C4.2 U1.35 Y1.2 | length 14.4
  Top Layer w0.254: U1.35@162.75,58.55 162.75,67.42 Y1.2@162.25,67.92 166.92,67.92 C4.2@167,68
NetC5_1: C5.1 U1.50 Y2.1 | length 16.3
  Top Layer w0.254: C5.1@142.75,49.7 Y2.1@147.6,49.7 ; Y2.1@148,49.75 150.5,52.25 U1.50@158.45,52.25
NetC6_2: C6.2 U1.49 Y2.2 | length 17.2
  Top Layer w0.254: C6.2@142.75,55.5 142.75,54.825 148.075,54.825 150.15,52.75 U1.49@158.45,52.75
NetC16_1: C16.1 U1.12 | length 4
  Top Layer w0.254: v1(169.25,52.75) U1.12@171.55,52.75
  Bottom Layer w1: v1(169.25,52.75) 169.275,52.75 169.25,52.725 C16.1@169.25,54.4
NetC25_2: C25.2 R14.2 U5.21 | length 121.1
  Top Layer w0.254: R14.2@46,43 47.5,41.5 49.2,41.5 50.3,42.6 v1(50.3,48.6) ; v1(50.3,53.4) 52.749,55.849 70.073,55.849 84.845,55.849 101.949,55.849 v1(103.1,57) ; C25.2@126.25,60.3 v1(128.2,60.3) ; v1(133.7,61.6) 133.9,61.6 134.2,61.3 U5.21@136.325,61.3
  Bottom Layer w0.254: v1(50.3,48.6) v1(50.3,53.4) ; v1(103.1,57) 103.1,63.361 104.358,64.619 105.003,65.264 105.003,67.799 106.223,69.019 110.277,69.019 111.27,68.026 111.27,67.991 119.842,59.419 127.319,59.419 v1(128.2,60.3) 128.819,60.919 130.197,60.919 132.819,60.919 133.7,61.8 v1(133.7,61.6)
NetC26_1: C26.1 U5.6 | length 4.6
  Top Layer w0.254: C26.1@126.25,67.75 126.7,67.3 U5.6@130.675,67.3
NetC27_1: C27.1 J1.2 Q1.3 Q2.4 U5.9 | length 72.9
  Top Layer w0.254: C27.1@126.25,65.8 126.75,66.3 128.9,66.3 129.4,65.8 U5.9@130.675,65.8 131.839,65.8 132.716,66.677 132.716,69.317 132.716,77.284 131.111,78.889 131.111,80.954 131.7,81.543 131.7,88.2 v1(130.8,89.1)
  Top Layer w1.5: v1(123.3,98.5) 123.3,93.5 127.7,89.1 v1(130.8,89.1)
  Bottom Layer w1.5: v1(123.3,98.5) 123.3,101.4 125.1,103.2 131.5,103.2 134.13,105.83 134.13,108.9 J1.2@134.13,116.1 ; Q1.3@129.04,89.1 v1(130.8,89.1)
  other v1: 119.4,98.8 124.6,99.9 119.4,100.3
NetC27_2: C27.2 U5.11 | length 7.3
  Top Layer w0.254: C27.2@124.75,65.8 124.75,64.95 124.9,64.8 127.4,64.8 127.9,64.3 128.5,64.3 129,64.8 U5.11@130.675,64.8
NetC28_1: C28.1 J1.1 Q3.3 Q4.4 U5.14 | length 76.3
  Top Layer w0.254: C28.1@126.25,63.3 U5.14@130.675,63.3 131.66,63.3 132.335,63.975 133.184,64.824 133.478,65.118 133.478,66.362 133.478,69.001 133.478,71.178 134.785,72.485 135.081,72.781 135.081,85.522 138.4,88.841 138.4,91.159 135.813,93.746 135.539,93.746 v1(135.5,93.785)
  Top Layer w1.5: v1(131.36,105.861) 136.564,105.861 v1(138.9,103.525)
  Bottom Layer w1.5: v1(131.36,105.861) J1.1@131.36,116.1 ; v1(135.5,93.785) 138.316,93.785 143.031,98.5 Q4.4@143.925,98.5 v1(138.9,103.525)
  other v1: 143.3,97 144.8,97 146.3,97 143.3,98.5 144.8,98.5 146.3,98.5 143.3,100 144.8,100 146.3,100
NetC28_2: C28.2 U5.12 | length 7.5
  Top Layer w0.254: C28.2@124.75,63.1 124.75,64.2 124.969,64.419 127.146,64.419 127.646,63.919 128.658,63.919 129.039,64.3 U5.12@130.675,64.3
NetC29_1: C29.1 J1.4 Q5.3 Q6.4 U5.3 | length 75.7
  Top Layer w0.254: v1(122,77.4) 122,72.55 C29.1@124.75,69.8 124.75,69 124.904,68.846 127.146,68.846 127.5,69.2 129.1,69.2 129.5,68.8 U5.3@130.675,68.8
  Top Layer w1.5: v1(122,77.4) 121.2,78.2 121.2,99.4 124.9,103.1 v1(135,103.1)
  Bottom Layer w1: Q6.4@124.1,77.5 Q6.4@124.1,78.3 ; 128.015,82.215 Q5.3@128.925,82.215
  Bottom Layer w1.5: Q6.4@124.1,78.3 128.015,82.215 ; v1(135,103.1) 139.67,107.77 J1.4@139.67,116.1
  other v1: 120.5,75.9 122,75.9 123.5,75.9 120.5,77.4 122,77.4 123.5,77.4 120.5,78.9 122,78.9 123.5,78.9
NetC29_2: C29.2 U5.1 | length 4.4
  Top Layer w0.254: C29.2@126.25,69.8 U5.1@130.675,69.8
NetC30_1: C30.1 J1.3 Q7.3 Q8.4 U5.36 | length 61.7
  Top Layer w0.254: U5.36@136.325,68.8 142.1,68.8 142.7,69.4 C30.1@142.7,69.7 ; C30.1@142.65,69.8 143.9,71.05 v1(143.9,77.4)
  Top Layer w1.5: v1(136.9,108.4) 138,108.4 141.5,104.9 141.5,79.8 v1(143.9,77.4) ; v1(138.6,86.8) 141.5,86.8
  Bottom Layer w1.5: v1(136.9,108.4) J1.3@136.9,116.1 ; Q7.3@137.075,86.785 v1@138.585,86.785
  other v1: 142.4,75.9 143.9,75.9 145.4,75.9 142.4,77.4 143.9,77.4 145.4,77.4 142.4,78.9 143.9,78.9 145.4,78.9
NetC30_2: C30.2 U5.38 | length 4.8
  Top Layer w0.254: U5.38@136.325,69.8 C30.2@141.15,69.8
NetC31_2: C31.2 R27.2 U6.21 | length 76.2
  Top Layer w0.254: R27.2@46,49 47.1,50.1 47.1,55.4 47.93,56.23 70.051,56.23 84.688,56.23 99.212,56.23 99.93,56.23 v1(100.5,56.8) ; C31.2@93.25,60.2 v1(95,60.2) ; v1(100,61.7) 100.4,61.3 U6.21@103.025,61.3
  Bottom Layer w0.254: v1(95,60.2) 100.4,60.2 ; v1@100.2,61.6 100.5,61.3 v1@100.5,56.7
NetC32_1: C32.1 U6.6 | length 3.8
  Top Layer w0.254: C32.1@93.55,67.3 U6.6@97.375,67.3
NetC33_1: C33.1 J2.2 Q9.3 Q10.4 U6.9 | length 68
  Top Layer w0.254: C33.1@93.639,66.189 95.468,66.189 95.857,65.8 U6.9@97.375,65.8 98.6,65.8 99.416,66.616 99.416,67.229 99.416,67.99 99.416,72.548 99.416,77.484 98.411,78.489 98.411,81.211 98.938,81.738 98.938,87.762 v1(97.5,89.2)
  Top Layer w1.5: v1(90.2,99) 90.2,92.5 93.5,89.2 v1(97.5,89.2)
  Bottom Layer w1.5: Q10.4@89.301,98.5 90.2,98.5 96.73,105.03 J2.2@96.73,116.1 ; Q9.3@95.94,89.2 v1(97.5,89.2)
  other v1: 86.2,99 91.8,99 86.2,100.5 91.8,100.5
NetC33_2: C33.2 U6.11 | length 6.7
  Top Layer w0.254: C33.2@91.75,65.8 91.75,65.15 92.1,64.8 94,64.8 94.004,64.804 94.397,64.411 95.711,64.411 96.1,64.8 U6.11@97.375,64.8
NetC34_1: C34.1 J2.1 Q11.3 Q12.4 U6.14 | length 80
  Top Layer w0.254: C34.1@93.25,63.3 U6.14@97.375,63.3 98.561,63.3 100.178,64.917 100.178,68.306 100.178,72.232 100.178,72.274 100.319,72.415 100.424,72.52 101.87,73.966 101.87,73.974 101.87,85.311 104.459,87.9 104.954,88.395 104.954,91.605 103.959,92.6 103,92.6 v1(101.8,93.8)
  Top Layer w1.5: v1(93.96,105.46) 99.04,105.46 103.74,105.46 v1(104.5,104.7)
  Bottom Layer w1.5: v1(93.96,105.46) J2.1@93.96,116.1 ; v1(101.8,93.8) 103.8,93.8 104.539,93.785 Q12.4@109.254,98.5 ; v1(104.5,104.7) Q12.4@110.7,98.5
  other v1: 110.4,97 111.9,97 113.4,97 110.4,98.5 111.9,98.5 113.4,98.5 110.4,100 111.9,100 113.4,100
NetC34_2: C34.2 U6.12 | length 6.8
  Top Layer w0.254: C34.2@91.75,63.3 91.75,64.05 92,64.3 93.859,64.3 94.259,63.9 95.739,63.9 96.139,64.3 U6.12@97.375,64.3
NetC35_1: C35.1 J2.4 Q13.3 Q14.4 U6.3 | length 72
  Top Layer w0.254: v1@88.8,77.9 88.8,72.641 92.641,68.8 94.1,68.8 94.5,69.2 95.7,69.2 96.1,68.8 U6.3@97.375,68.8
  Top Layer w1.5: v1@88.8,77.9 87.9,78.8 87.9,99.4 91.4,102.9 v1(98.3,102.9)
  Bottom Layer w1.5: Q14.4@90.846,77.6 Q13.3@95.461,82.215 ; v1(98.3,102.9) 100.2,102.9 102.27,104.97 J2.4@102.27,116.1
  other v1: 87.5,76.1 89,76.1 90.5,76.1 87.5,77.6 89,77.6 89,77.6 90.5,77.6 87.5,79.1 89,79.1 90.5,79.1
NetC35_2: C35.2 U6.1 | length 4.1
  Top Layer w0.254: C35.2@93.25,69.8 U6.1@97.375,69.8
NetC36_1: C36.1 J2.3 Q15.3 Q16.4 U6.36 | length 65.1
  Top Layer w0.254: U6.36@103.025,68.8 108.4,68.8 108.75,69.15 C36.1@108.75,69.8 108.6,69.95 108.6,75.2 v1(110.9,77.5)
  Top Layer w1.5: v1(99.5,108.1) 105.1,108.1 107.4,105.8 107.4,101.499 107.4,81 v1(110.9,77.5) ; v1(105.7,86.7) 107.4,86.7
  Bottom Layer w1.5: v1(99.5,108.1) J2.3@99.5,116.1 ; Q15.3@104.075,86.785 v1@105.615,86.785
  other v1: 109.4,76 110.9,76 112.4,76 109.4,77.5 110.9,77.5 112.4,77.5 109.4,79 110.9,79 112.4,79
NetC36_2: C36.2 U6.38 | length 4.2
  Top Layer w0.254: U6.38@103.025,69.8 C36.2@107.25,69.8
NetC37_2: C37.2 R36.2 U7.21 | length 28.7
  Top Layer w0.254: R36.2@46,55 46,56.7 47.1,57.8 58.6,57.8 59.731,58.931 C37.2@59.731,59.919 ; C37.2@59.8,60 v1(61.5,60) ; v1(67.5,62.2) 68.4,61.3 U7.21@69.825,61.3
  Bottom Layer w0.254: v1(61.5,60) 65.3,60 v1(67.5,62.2)
NetC38_1: C38.1 U7.6 | length 3.9
  Top Layer w0.254: C38.1@60.25,67.3 U7.6@64.175,67.3
NetC39_1: C39.1 J4.2 Q17.3 Q18.4 U7.9 | length 65.7
  Top Layer w0.254: C39.1@59.75,65.8 60.25,66.3 62.569,66.3 63.069,65.8 U7.9@64.175,65.8 65.7,65.8 66.26,66.36 66.26,72.783 66.26,75.871 66.26,76.818 66.216,76.862 64.9,78.178 64.9,81.243 65.389,81.732 65.389,87.911 v1@64.035,89.265 ; v1@64.035,89.265 v1(64,89.265) v1@64.035,89.265
  Top Layer w1.5: v1(56.5,98.6) 56.5,94.1 61.335,89.265 v1@64.035,89.265
  Bottom Layer w1: Q17.3@62.425,89.265 v1(64,89.265)
  Bottom Layer w1.5: v1(56.5,98.6) 56.5,99 59.13,101.63 59.13,110.83 J4.2@59.13,116.1
  other v1: 50.8,98.6 53,98.6 58.2,98.7 50.8,100.2 53,100.2 58.2,100.3
NetC39_2: C39.2 U7.11 | length 7.3
  Top Layer w0.254: C39.2@58.25,65.8 58.25,65.05 58.5,64.8 60.398,64.8 60.998,64.2 62.156,64.2 62.756,64.8 U7.11@64.175,64.8
NetC40_1: C40.1 J4.1 Q19.3 Q20.4 U7.14 | length 86
  Top Layer w0.254: C40.1@59.75,63.3 U7.14@64.175,63.3 66,63.3 67.022,64.322 67.022,64.533 67.022,72.533 67.638,73.149 68.451,73.962 68.562,74.073 68.781,74.292 68.781,86.72 70.246,88.185 72.046,88.185 72.719,88.858 72.719,92.081 72,92.8 70.5,92.8 v1(69.5,93.8)
  Top Layer w1.5: v1(56.36,105.54) 66.36,105.54 67.8,104.1 67.8,95.5 v1(69.5,93.8)
  Bottom Layer w1.5: v1(56.36,105.54) J4.1@56.36,116.1 ; v1@69.535,93.835 71.785,93.835 Q20.4@76.5,98.55 ; Q20.4@77.25,98.55 Q20.4@77.925,98.55
  other v1: 76.6,97 78.1,97 79.6,97 76.6,98.5 78.1,98.5 79.6,98.5 76.6,100 78.1,100 79.6,100
NetC40_2: C40.2 U7.12 | length 7.2
  Top Layer w0.254: C40.2@58.25,63.3 58.25,64.05 58.5,64.3 60.359,64.3 60.84,63.819 62.319,63.819 62.8,64.3 U7.12@64.175,64.3